# Altium PCB m2m00.PcbDoc
Units mil, origin at the board's own origin, x right, y up, seen from the top; angles counter-clockwise.
Board outline 2238.38 x 2309.5 mil, 2 copper layers (Top Layer, Bottom Layer); 171 components, 130 nets, 571 pads, 4 vias.
Unrouted connection lines stored in the file: 289.
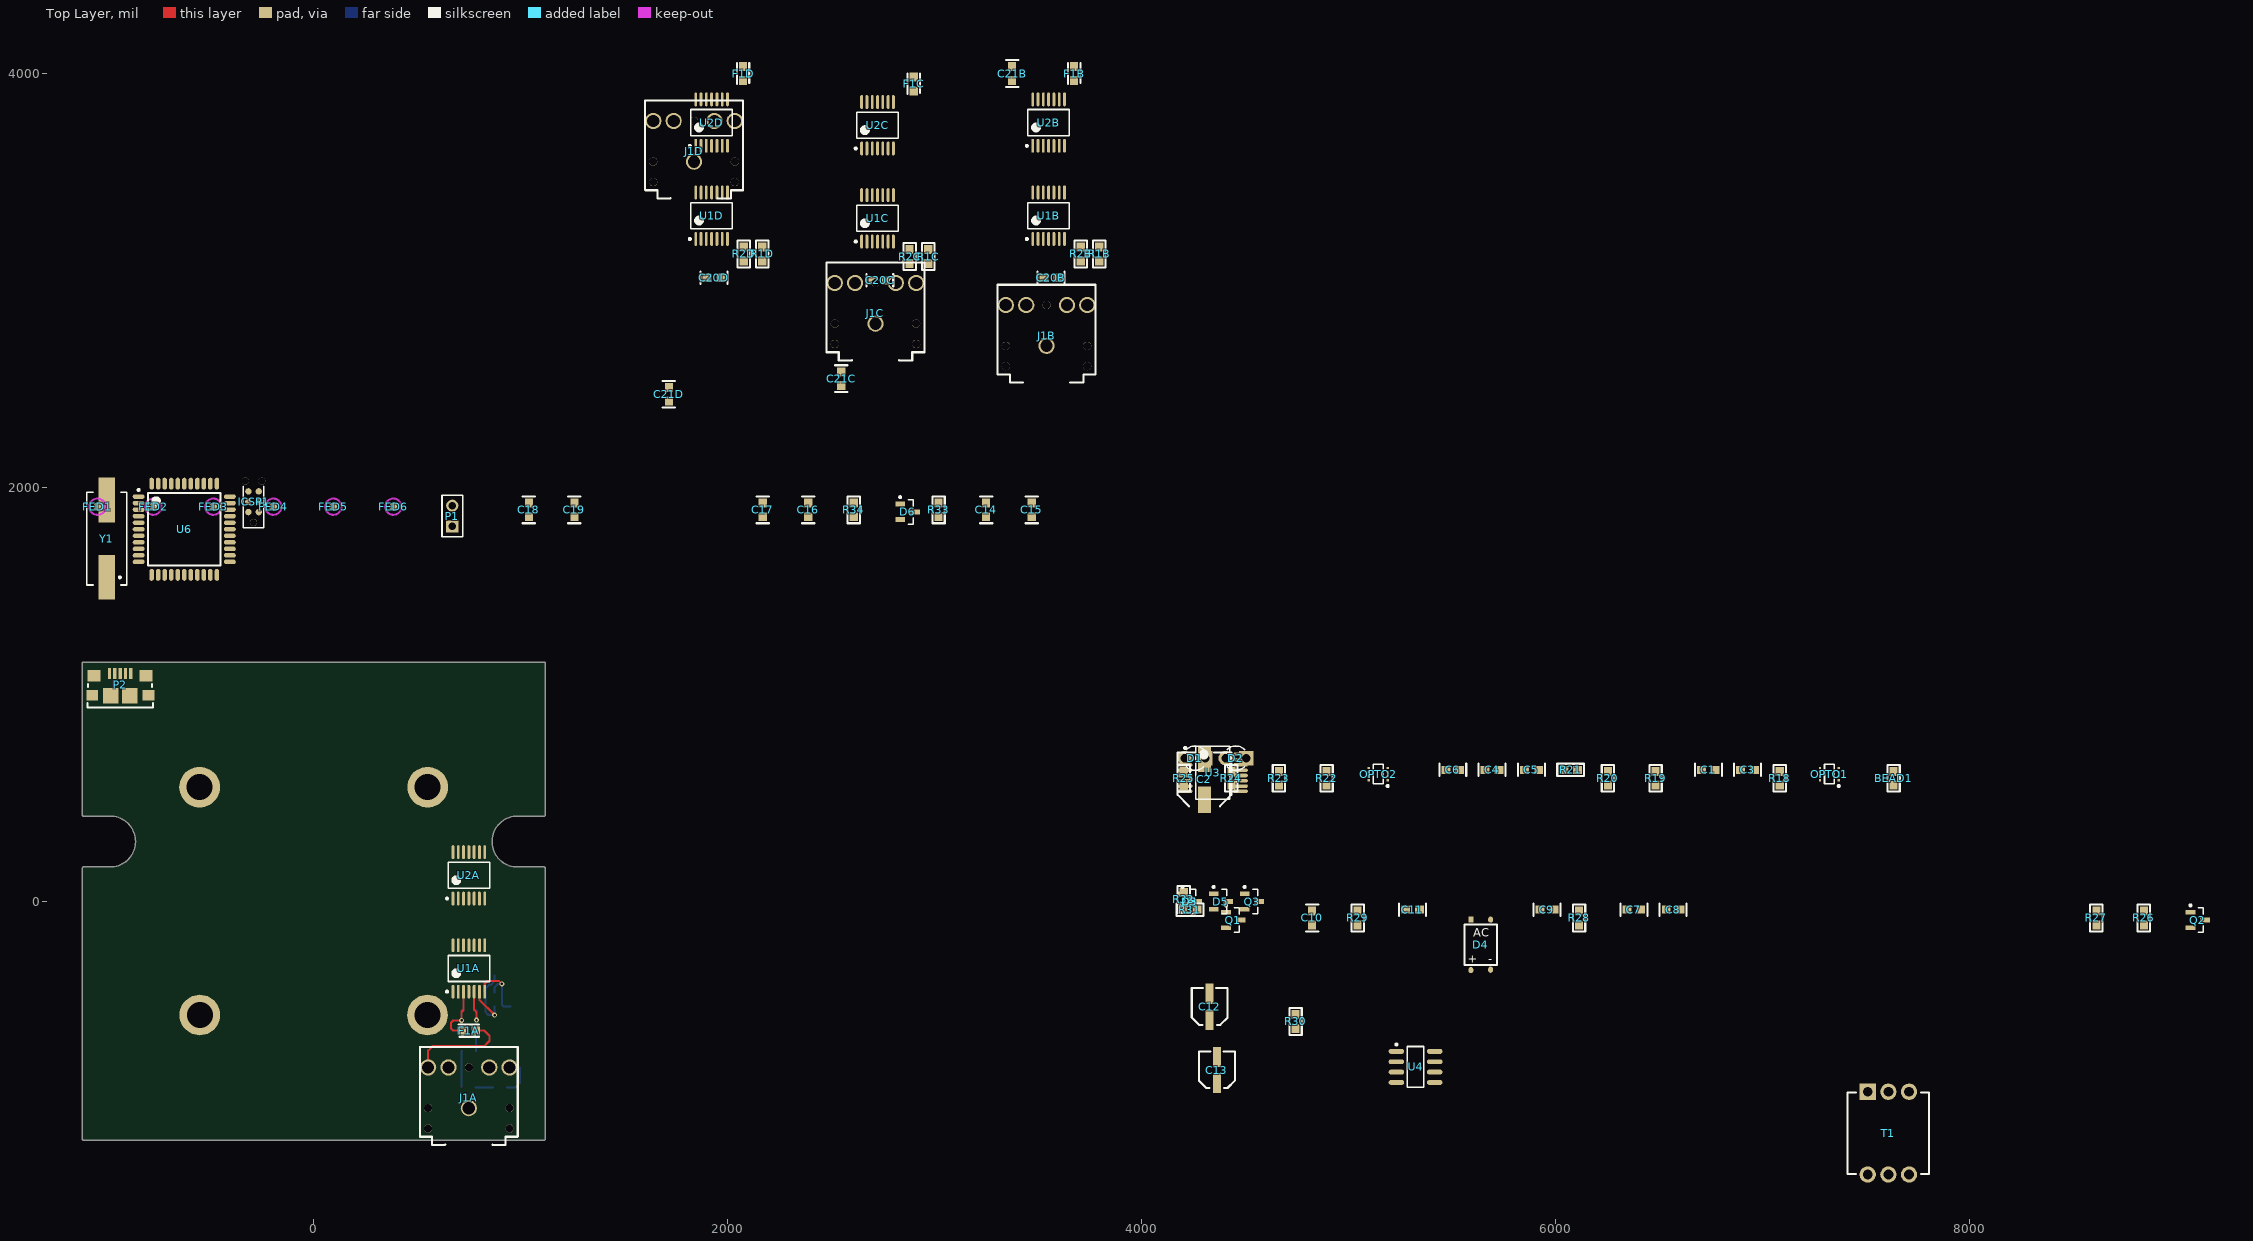
[diagram p0: Top Layer view]
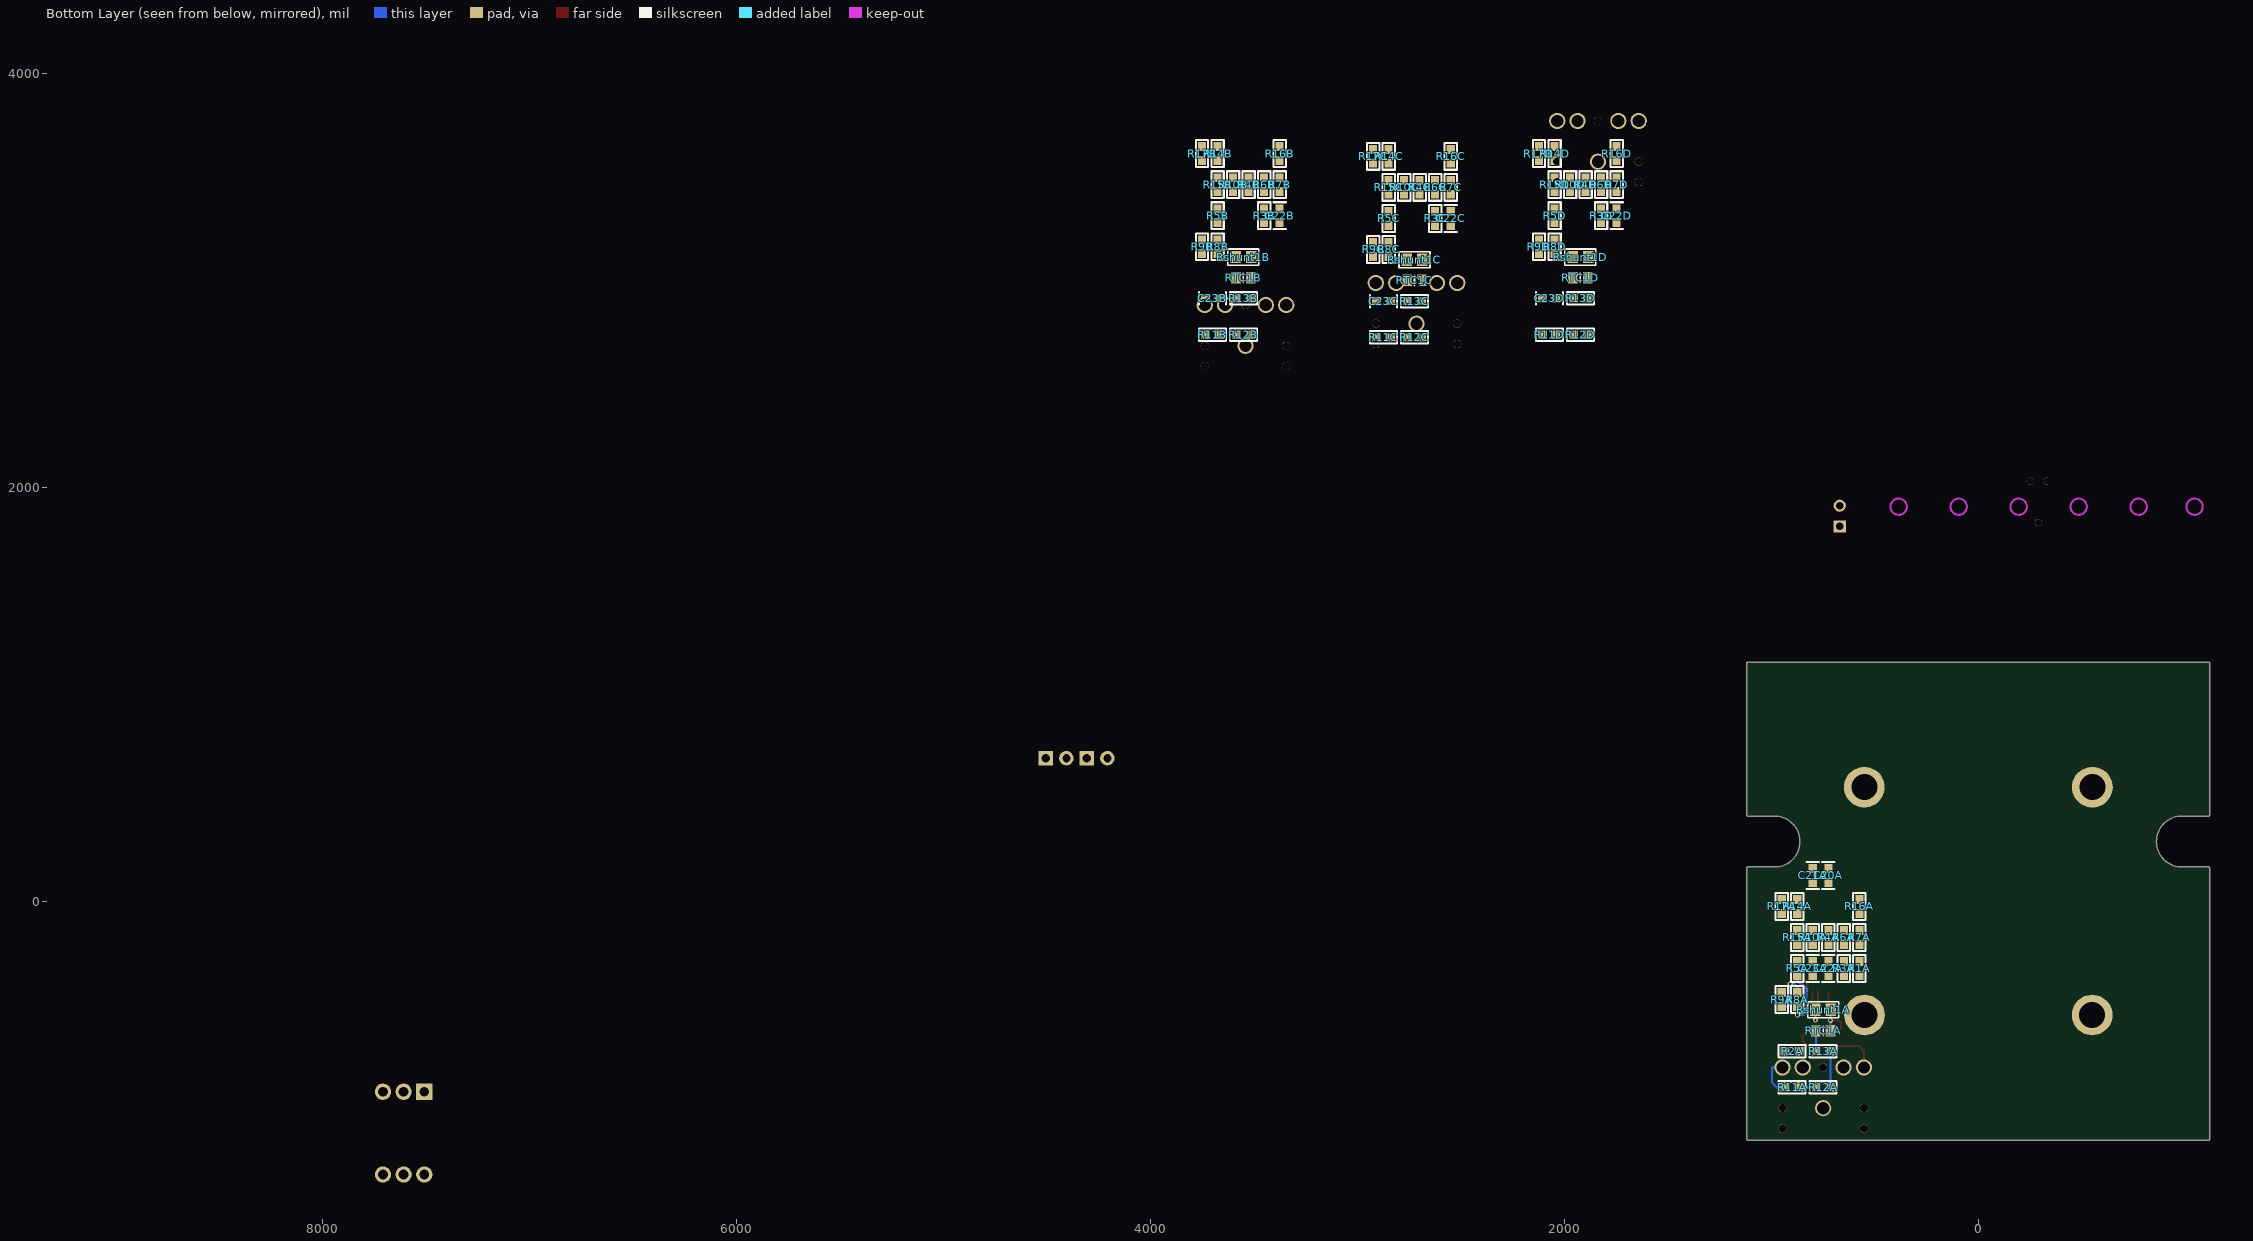
[diagram p1: Bottom Layer view, seen from below]

## Layer stack, top to bottom
Top Layer: signal copper 1.4
Dielectric: dielectric 12.6, FR-4, Dk 4.8
Bottom Layer: signal copper 1.4

## Board outline
-1112.6,-1154.62 cw(c-1112.6,-1149.6) -1117.61,-1149.6 -1117.61,160.43 cw(c-1112.6,160.43) -1112.6,165.45 -983.46,165.45 ccw(c-983.46,288.39) -860.53,288.39 ccw(c-983.46,288.39) -983.46,411.32 -1112.6,411.32 cw(c-1112.6,416.34) -1117.52,415.36 cw(c-1114.17,419.09) -1119.19,419.09 -1119.19,1149.87 cw(c-1114.17,1149.87) -1114.17,1154.89 1114.17,1154.89 cw(c1114.17,1149.87) 1119.19,1149.87 1119.19,419.09 cw(c1114.17,419.09) 1119,417.72 cw(c1114.17,416.34) 1119.19,416.34 cw(c1114.17,416.34) 1114.17,411.32 985.04,411.32 ccw(c985.04,288.39) 985.04,165.45 1114.17,165.45 cw(c1114.17,160.43) 1119.19,160.43 1119.19,-1149.6 cw(c1114.17,-1149.6) 1114.17,-1154.62

## Design rules (kind name [scope] priority, off if disabled: settings)
Clearance [All] p1: gap=10
PolygonConnect [All] p1: connectstyle=Relief reliefconductorwidth=10 reliefentries=4 polygonreliefangle="90 Angle"
RoomDefinition "U_USB-UART (FTDI FT230XS)" [InComponentClass('U_USB-UART (FTDI FT230XS)')] p1: confinementstyle=ConfineIn formatcopy=TRUE lockcomponents=FALSE outline 4159.97,519.24 7884.97,519.24 7884.97,774.24 4159.97,774.24
RoomDefinition "U_Microprocessor PIC18F46K80" [InComponentClass('U_Microprocessor PIC18F46K80')] p2: confinementstyle=ConfineIn formatcopy=TRUE lockcomponents=FALSE outline -1110,1751.54 3610,1751.54 3610,2071.54 -1110,2071.54
RoomDefinition "U_ISOLATED PSU" [InComponentClass('U_ISOLATED PSU')] p3: confinementstyle=ConfineIn formatcopy=TRUE lockcomponents=FALSE outline 4159.97,-2240.76 9174.97,-2240.76 9174.97,99.24 4159.97,99.24
RoomDefinition U_ANALOGCHANNEL4 [InComponentClass('U_ANALOGCHANNEL4')] p4: confinementstyle=ConfineIn formatcopy=TRUE lockcomponents=FALSE outline 1673.23,2488.19 2173.23,2488.19 2173.23,4087.8 1673.23,4087.8
RoomDefinition U_ANALOGCHANNEL3 [InComponentClass('U_ANALOGCHANNEL3')] p5: confinementstyle=ConfineIn formatcopy=TRUE lockcomponents=FALSE outline 2475,2475.4 2975,2475.4 2975,4075 2475,4075
RoomDefinition U_ANALOGCHANNEL2 [InComponentClass('U_ANALOGCHANNEL2')] p6: confinementstyle=ConfineIn formatcopy=TRUE lockcomponents=FALSE outline 3301.77,2488.19 3801.77,2488.19 3801.77,4087.8 3301.77,4087.8
RoomDefinition U_ANALOGCHANNEL1 [InComponentClass('U_ANALOGCHANNEL1')] p7: confinementstyle=ConfineIn formatcopy=FALSE lockcomponents=FALSE outline 500,-1149.6 1000,-1149.6 1000,450 500,450
RoomDefinition Multi2Meter [InComponentClass('Multi2Meter')] p8: confinementstyle=ConfineIn formatcopy=TRUE lockcomponents=FALSE outline -1112.6,-1149.6 1114.17,-1149.6 1114.17,1149.87 -1112.6,1149.87
RoutingVias [All] p1: holewidth=12 width=24 viastyle="Through Hole" minholewidth=12 minwidth=24 maxholewidth=28 maxwidth=50
SilkscreenOverComponentPads [All] p1: minsilkscreentomaskgap=10
SolderMaskExpansion [All] p1: expansion=4
Width [All] p1: maxlimit=100 minlimit=10 preferedwidth=10
27 further rules are at their usual default settings.

## Classes and differential pairs
channel class "ANALOG CHANNEL": U_ANALOGCHANNEL1 U_ANALOGCHANNEL2 U_ANALOGCHANNEL3 U_ANALOGCHANNEL4
net class V_OUT[1..4]: V_OUT1 V_OUT2 V_OUT3 V_OUT4
net class I_OUT[1..4]: I_OUT1 I_OUT2 I_OUT3 I_OUT4
net class FREQ[1..4]: FREQ1 FREQ2 FREQ3 FREQ4
component class "U_USB-UART (FTDI FT230XS)": BEAD1 C1 C2 C3 C4 C5 C6 D1 D2 OPTO1 OPTO2 R18 R19 R20 R21 R22 R23 R24 R25 U3
component class "U_Microprocessor PIC18F46K80": C14 C15 C16 C17 C18 C19 D6 FED1 FED2 FED3 FED4 FED5 FED6 ICSP1 P1 R33 R34 U6 Y1
component class "U_ISOLATED PSU": C7 C8 C9 C10 C11 C12 C13 D3 D4 D5 Q1 Q2 Q3 R26 R27 R28 R29 R30 R31 R32 T1 U4 U5
component class U_ANALOGCHANNEL4: C20D C21D C22D C23D F1D J1D R1D R2D R3D R4D R5D R6D R7D R8D R9D R10D R11D R12D R13D R14D R15D R16D R17D Rshunt1D RTC1D U1D U2D
component class U_ANALOGCHANNEL3: C20C C21C C22C C23C F1C J1C R1C R2C R3C R4C R5C R6C R7C R8C R9C R10C R11C R12C R13C R14C R15C R16C R17C Rshunt1C RTC1C U1C U2C
component class U_ANALOGCHANNEL2: C20B C21B C22B C23B F1B J1B R1B R2B R3B R4B R5B R6B R7B R8B R9B R10B R11B R12B R13B R14B R15B R16B R17B Rshunt1B RTC1B U1B U2B
component class U_ANALOGCHANNEL1: C20A C21A C22A C23A F1A J1A R1_U_ANALOGCHANNEL1 R1A R2A R3_U_ANALOGCHANNEL1 R3A R4A R5_U_ANALOGCHANNEL1 R5A R6A R7A R8_U_ANALOGCHANNEL1 R8A R9_U_ANALOGCHANNEL1 R9A R10_U_ANALOGCHANNEL1 R10A R11_U_ANALOGCHANNEL1 R11A R12_U_ANALOGCHANNEL1 R12A R13_U_ANALOGCHANNEL1 R13A R14_U_ANALOGCHANNEL1 R14A R15_U_ANALOGCHANNEL1 R15A R16_U_ANALOGCHANNEL1 R16A R17_U_ANALOGCHANNEL1 R17A Rshunt1A RTC1A U1A U2A
component class Multi2Meter: P2

## Components (designator, comment, footprint, x,y, rotation, side; value= is the part's Value field where it differs from the comment)
BEAD1 "MH1608-601Y" "RES (3D) - 0603" 7634.97,594.24 r90 top
C1 "10nF" "CAP (3D) - 0603" 6739.97,634.24 r0 top
C2 "47uF" "CAP ELECTRO SIZE-D" 4304.89,588.82 r0 top
C3 "10nF" "CAP (3D) - 0603" 6929.97,634.24 r0 top
C4 "47pF" "CAP (3D) - 0603" 5694.97,634.24 r0 top
C5 "47pF" "CAP (3D) - 0603" 5884.97,634.24 r0 top
C6 "100nF" "CAP (3D) - 0603" 5504.97,634.24 r0 top
C7 "100nF" "CAP (3D) - 0603" 6379.97,-40.76 r0 top
C8 "100nF" "CAP (3D) - 0603" 6569.97,-40.76 r0 top
C9 "100nF" "CAP (3D) - 0603" 5959.97,-40.76 r0 top
C10 "100nF" "CAP (3D) - 0603" 4824.97,-80.76 r90 top
C11 "100nF" "CAP (3D) - 0603" 5309.97,-40.76 r0 top
C12 "10uF" "CAP ELECTRO SIZE-B" 4329.97,-510.76 r0 top
C13 "10uF" "CAP ELECTRO SIZE-B" 4364.97,-815.76 r0 top
C14 "100nF" "CAP (3D) - 0603" 3250,1891.54 r90 top
C15 "100nF" "CAP (3D) - 0603" 3470,1891.54 r90 top
C16 "100nF" "CAP (3D) - 0603" 2390,1891.54 r90 top
C17 "100nF" "CAP (3D) - 0603" 2170,1891.54 r90 top
C18 "15pF" "CAP (3D) - 0603" 1040,1891.54 r90 top
C19 "15pF" "CAP (3D) - 0603" 1260,1891.54 r90 top
C20A "100nF" "CAP (3D) - 0603" 725,125 r270 bottom (schematic designator C20)
C20B "100nF" "CAP (3D) - 0603" 3562.65,3012.8 r0 top (schematic designator C20)
C20C "100nF" "CAP (3D) - 0603" 2735.88,3000 r0 top (schematic designator C20)
C20D "100nF" "CAP (3D) - 0603" 1934.11,3012.8 r0 top (schematic designator C20)
C21A "100nF" "CAP (3D) - 0603" 800,125 r90 bottom (schematic designator C21)
C21B "100nF" "CAP (3D) - 0603" 3375,4000 r270 top (schematic designator C21)
C21C "100nF" "CAP (3D) - 0603" 2550,2525 r270 top (schematic designator C21)
C21D "100nF" "CAP (3D) - 0603" 1716.69,2449.95 r270 top (schematic designator C21)
C22A "100nF" "CAP (3D) - 0603" 725,-325 r270 bottom (schematic designator C22)
C22B "100nF" "CAP (3D) - 0603" 3376.77,3312.8 r90 bottom (schematic designator C22)
C22C "100nF" "CAP (3D) - 0603" 2550,3300 r90 bottom (schematic designator C22)
C22D "100nF" "CAP (3D) - 0603" 1748.23,3312.8 r90 bottom (schematic designator C22)
C23A "100nF" "CAP (3D) - 0603" 800,-325 r90 bottom (schematic designator C23)
C23B "100nF" "CAP (3D) - 0603" 3701.77,2912.8 r180 bottom (schematic designator C23)
C23C "100nF" "CAP (3D) - 0603" 2875,2900 r180 bottom (schematic designator C23)
C23D "100nF" "CAP (3D) - 0603" 2073.23,2912.8 r180 bottom (schematic designator C23)
D1 "GREEN 3mm" "LED(3D) 3MM VERTICAL (GREEN)" 4258.91,691.47 r0 top
D2 "RED 3mm" "LED(3D) 3MM VERTICAL (GREEN)" 4456.91,691.47 r0 top
D3 "5V1" SOT23-3L 4234.93,-1.47 r0 top
D4 "MB110S-TP" TO-269AA 5639.97,-210.76 r0 top
D5 "5V1" SOT23-3L 4384.85,-1.47 r0 top
D6 "BAV99" SOT23-3L 2870,1881.54 r0 top
F1A "Fuse 1" "FUSE (3D) - 0603" 750,-625 r0 top (schematic designator F1)
F1B "Fuse 1" "FUSE (3D) - 0603" 3675,4000 r90 top (schematic designator F1)
F1C "Fuse 1" "FUSE (3D) - 0603" 2900,3950 r90 top (schematic designator F1)
F1D "Fuse 1" "FUSE (3D) - 0603" 2075,4000 r90 top (schematic designator F1)
FED1 "Feducial" Feducial -1045,1906.54 r90 top
FED2 "Feducial" Feducial -775,1906.54 r90 top
FED3 "Feducial" Feducial -485,1906.54 r90 top
FED4 "Feducial" Feducial -195,1906.54 r90 top
FED5 "Feducial" Feducial 95,1906.54 r90 top
FED6 "Feducial" Feducial 385,1906.54 r90 top
ICSP1 "TAG CONNECT" "ICSP - TAG CONNECT TYPE2" -290.34,1830.54 r90 top
J1A "PENDANT" "3.5MM pcb mouNt" 750,-1000 r270 top (schematic designator J1)
J1B "PENDANT" "3.5MM pcb mouNt" 3541.8,2683.95 r270 top (schematic designator J1)
J1C "PENDANT" "3.5MM pcb mouNt" 2715.03,2791.16 r270 top (schematic designator J1)
J1D "PENDANT" "3.5MM pcb mouNt" 1838.26,3573.95 r270 top (schematic designator J1)
OPTO1 "LTV-816S" S-DIP-B8 7324.97,614.24 r90 top
OPTO2 "LTV-816S" S-DIP-B8 5144.97,614.24 r90 top
P1 "TEST" HDR1X2 670,1811.54 r90 top
P2 "Header 4" "MICRO USB" -935.21,1099.3 r0 top
Q1 "MMUN2211LT1" SOT23-3L 4444.97,-90.76 r0 top
Q2 "BC817" SOT23-3L 9104.97,-90.76 r0 top
Q3 "BC807" SOT23-3L 4534.77,-1.47 r0 top
R1A "10k" "RES (3D) - 0603" 575,-325 r90 bottom (schematic designator R1)
R1B "10k" "RES (3D) - 0603" 3796.77,3128.19 r90 top (schematic designator R1)
R1C "10k" "RES (3D) - 0603" 2970,3115.4 r90 top (schematic designator R1)
R1D "10k" "RES (3D) - 0603" 2168.23,3128.19 r90 top (schematic designator R1)
R2A "24k" "RES (3D) - 0603" 900,-725 r180 bottom (schematic designator R2)
R2B "24k" "RES (3D) - 0603" 3706.77,3128.19 r90 top (schematic designator R2)
R2C "24k" "RES (3D) - 0603" 2880,3115.4 r90 top (schematic designator R2)
R2D "24k" "RES (3D) - 0603" 2078.23,3128.19 r90 top (schematic designator R2)
R3A "16k" "RES (3D) - 0603" 650,-325 r270 bottom (schematic designator R3)
R3B "16k" "RES (3D) - 0603" 3451.77,3312.8 r270 bottom (schematic designator R3)
R3C "16k" "RES (3D) - 0603" 2625,3300 r270 bottom (schematic designator R3)
R3D "16k" "RES (3D) - 0603" 1823.23,3312.8 r270 bottom (schematic designator R3)
R4A "100k" "RES (3D) - 0603" 725,-175 r270 bottom (schematic designator R4)
R4B "100k" "RES (3D) - 0603" 3526.77,3462.8 r270 bottom (schematic designator R4)
R4C "100k" "RES (3D) - 0603" 2700,3450 r270 bottom (schematic designator R4)
R4D "100k" "RES (3D) - 0603" 1898.23,3462.8 r270 bottom (schematic designator R4)
R5A "10k" "RES (3D) - 0603" 875,-325 r270 bottom (schematic designator R5)
R5B "10k" "RES (3D) - 0603" 3676.77,3312.8 r270 bottom (schematic designator R5)
R5C "10k" "RES (3D) - 0603" 2850,3300 r270 bottom (schematic designator R5)
R5D "10k" "RES (3D) - 0603" 2048.23,3312.8 r270 bottom (schematic designator R5)
R6A "100k" "RES (3D) - 0603" 650,-175 r270 bottom (schematic designator R6)
R6B "100k" "RES (3D) - 0603" 3451.77,3462.8 r270 bottom (schematic designator R6)
R6C "100k" "RES (3D) - 0603" 2625,3450 r270 bottom (schematic designator R6)
R6D "100k" "RES (3D) - 0603" 1823.23,3462.8 r270 bottom (schematic designator R6)
R7A "11k" "RES (3D) - 0603" 575,-175 r270 bottom (schematic designator R7)
R7B "11k" "RES (3D) - 0603" 3376.77,3462.8 r270 bottom (schematic designator R7)
R7C "11k" "RES (3D) - 0603" 2550,3450 r270 bottom (schematic designator R7)
R7D "11k" "RES (3D) - 0603" 1748.23,3462.8 r270 bottom (schematic designator R7)
R8A "16k" "RES (3D) - 0603" 875,-475 r270 bottom (schematic designator R8)
R8B "16k" "RES (3D) - 0603" 3676.77,3162.8 r270 bottom (schematic designator R8)
R8C "16k" "RES (3D) - 0603" 2850,3150 r270 bottom (schematic designator R8)
R8D "16k" "RES (3D) - 0603" 2048.23,3162.8 r270 bottom (schematic designator R8)
R9A "10k" "RES (3D) - 0603" 950,-475 r90 bottom (schematic designator R9)
R9B "10k" "RES (3D) - 0603" 3751.77,3162.8 r90 bottom (schematic designator R9)
R9C "10k" "RES (3D) - 0603" 2925,3150 r90 bottom (schematic designator R9)
R9D "10k" "RES (3D) - 0603" 2123.23,3162.8 r90 bottom (schematic designator R9)
R10A "24k" "RES (3D) - 0603" 800,-175 r270 bottom (schematic designator R10)
R10B "24k" "RES (3D) - 0603" 3601.77,3462.8 r270 bottom (schematic designator R10)
R10C "24k" "RES (3D) - 0603" 2775,3450 r270 bottom (schematic designator R10)
R10D "24k" "RES (3D) - 0603" 1973.23,3462.8 r270 bottom (schematic designator R10)
R11A "9M1" "RES (3D) - 0603" 900,-900 r0 bottom (schematic designator R11)
R11B "9M1" "RES (3D) - 0603" 3701.77,2737.8 r0 bottom (schematic designator R11)
R11C "9M1" "RES (3D) - 0603" 2875,2725 r0 bottom (schematic designator R11)
R11D "9M1" "RES (3D) - 0603" 2073.23,2737.8 r0 bottom (schematic designator R11)
R12A "470k" "RES (3D) - 0603" 750,-900 r0 bottom (schematic designator R12)
R12B "470k" "RES (3D) - 0603" 3551.77,2737.8 r0 bottom (schematic designator R12)
R12C "470k" "RES (3D) - 0603" 2725,2725 r0 bottom (schematic designator R12)
R12D "470k" "RES (3D) - 0603" 1923.23,2737.8 r0 bottom (schematic designator R12)
R13A "430k" "RES (3D) - 0603" 750,-725 r180 bottom (schematic designator R13)
R13B "430k" "RES (3D) - 0603" 3551.77,2912.8 r180 bottom (schematic designator R13)
R13C "430k" "RES (3D) - 0603" 2725,2900 r180 bottom (schematic designator R13)
R13D "430k" "RES (3D) - 0603" 1923.23,2912.8 r180 bottom (schematic designator R13)
R14A "100k" "RES (3D) - 0603" 875,-25 r90 bottom (schematic designator R14)
R14B "100k" "RES (3D) - 0603" 3676.77,3612.8 r90 bottom (schematic designator R14)
R14C "100k" "RES (3D) - 0603" 2850,3600 r90 bottom (schematic designator R14)
R14D "100k" "RES (3D) - 0603" 2048.23,3612.8 r90 bottom (schematic designator R14)
R15A "100k" "RES (3D) - 0603" 875,-175 r270 bottom (schematic designator R15)
R15B "100k" "RES (3D) - 0603" 3676.77,3462.8 r270 bottom (schematic designator R15)
R15C "100k" "RES (3D) - 0603" 2850,3450 r270 bottom (schematic designator R15)
R15D "100k" "RES (3D) - 0603" 2048.23,3462.8 r270 bottom (schematic designator R15)
R16A "24k" "RES (3D) - 0603" 575,-25 r90 bottom (schematic designator R16)
R16B "24k" "RES (3D) - 0603" 3376.77,3612.8 r90 bottom (schematic designator R16)
R16C "24k" "RES (3D) - 0603" 2550,3600 r90 bottom (schematic designator R16)
R16D "24k" "RES (3D) - 0603" 1748.23,3612.8 r90 bottom (schematic designator R16)
R17A "11k" "RES (3D) - 0603" 950,-25 r90 bottom (schematic designator R17)
R17B "11k" "RES (3D) - 0603" 3751.77,3612.8 r90 bottom (schematic designator R17)
R17C "11k" "RES (3D) - 0603" 2925,3600 r90 bottom (schematic designator R17)
R17D "11k" "RES (3D) - 0603" 2123.23,3612.8 r90 bottom (schematic designator R17)
R18 "470R" "RES (3D) - 0603" 7084.97,594.24 r90 top
R19 "27R" "RES (3D) - 0603" 6484.97,594.24 r90 top
R20 "1k" "RES (3D) - 0603" 6254.97,594.24 r90 top
R21 "27R" "RES (3D) - 0603" 6074.97,634.24 r0 top
R22 "470R" "RES (3D) - 0603" 4894.97,594.24 r90 top
R23 "1k" "RES (3D) - 0603" 4664.97,594.24 r90 top
R24 "470R" "RES (3D) - 0603" 4434.97,594.24 r90 top
R25 "470R" "RES (3D) - 0603" 4204.97,594.24 r90 top
R26 "1k" "RES (3D) - 0603" 8844.97,-80.76 r90 top
R27 "100k" "RES (3D) - 0603" 8614.97,-80.76 r90 top
R28 "100R" "RES (3D) - 0603" 6114.97,-80.76 r90 top
R29 "100k" "RES (3D) - 0603" 5044.97,-80.76 r90 top
R30 "1k" "RES (3D) - 0603" 4744.97,-580.76 r90 top
R31 "10k" "RES (3D) - 0603" 4234.97,-40.76 r0 top
R32 "10k" "RES (3D) - 0603" 4204.97,9.24 r90 top
R33 "1k" "RES (3D) - 0603" 3020,1891.54 r90 top
R34 "1k" "RES (3D) - 0603" 2610,1891.54 r90 top
Rshunt1A "0.1R" "RES (3D) - 0805" 750,-525 r0 bottom (schematic designator Rshunt1)
Rshunt1B "0.1R" "RES (3D) - 0805" 3551.77,3112.8 r0 bottom (schematic designator Rshunt1)
Rshunt1C "0.1R" "RES (3D) - 0805" 2725,3100 r0 bottom (schematic designator Rshunt1)
Rshunt1D "0.1R" "RES (3D) - 0805" 1923.23,3112.8 r0 bottom (schematic designator Rshunt1)
RTC1A "50V RMS" 6-0805_N 750,-625 r180 bottom (schematic designator RTC1)
RTC1B "50V RMS" 6-0805_N 3551.77,3012.8 r180 bottom (schematic designator RTC1)
RTC1C "50V RMS" 6-0805_N 2725,3000 r180 bottom (schematic designator RTC1)
RTC1D "50V RMS" 6-0805_N 1923.23,3012.8 r180 bottom (schematic designator RTC1)
T1 "MURATA 782485/55C" 78248 7609.97,-1120.76 r90 top
U1A "LM2902PW" PW014_N 750,-325 r90 top (schematic designator U1)
U1B "LM2902PW" PW014_N 3551.77,3312.8 r90 top (schematic designator U1)
U1C "LM2902PW" PW014_N 2725,3300 r90 top (schematic designator U1)
U1D "LM2902PW" PW014_N 1923.23,3312.8 r90 top (schematic designator U1)
U2A "LM2902PW" PW014_N 750,125 r90 top (schematic designator U2)
U2B "LM2902PW" PW014_N 3551.77,3762.8 r90 top (schematic designator U2)
U2C "LM2902PW" PW014_N 2725,3750 r90 top (schematic designator U2)
U2D "LM2902PW" PW014_N 1923.23,3762.8 r90 top (schematic designator U2)
U3 "FT230XS" SSOP16_L 4345.17,620.38 r0 top
U4 "MAX253" SO-8C_L 5324.97,-800.76 r0 top
U5 "LM4040AIM3-2.0" SOT23-3L 4234.93,-1.47 r0 top
U6 "PIC18F46K80-I/PT" TQFP44_L -625.28,1797.6 r0 top
Y1 "XTAL" HC49/4H_SMX -999.61,1752.26 r90 top

## Footprints (in the part's own frame and the unit in brackets; to place one, negate y for a bottom-side part, rotate by r counter-clockwise, add the part's x,y. Pads: shape width x height; smd on the part's side, far side on the other; paste and mask are expansions set on the pad)
"3.5MM pcb mouNt" [mm]
  round 1 hole 1: 0(-5,0) 0(0,5) 0(0,-5) 0(2.5,5) 0(2.5,-5)
  round 2 hole 1.5: 1(0,0) 2(-5,5) 3(-5,2.5) 4(-5,-2.5) 5(-5,-5)
  silkscreen extent -7.5,-6.01 4.5,6.01, body extent -7.5,-6 6.55,6, height 5.52
6-0805_N [mm] "Chip Resistor, Body 2.0x1.2mm, IPC Medium Density"
  rect 1.2x1.4 smd: 1(-0.9,0) 2(0.9,0)
  silkscreen extent 0,-0.6 0,0.6, body extent -1.07,-0.7 1.07,0.7, height 0.7
78248 [mm]
  rect 2x2 hole 1.2: 1(5.08,2.54)
  round 2 hole 1.2: 2(5.08,0) 3(5.08,-2.54) 4(-5.08,-2.54) 5(-5.08,0) 6(-5.08,2.54)
  silkscreen extent -5,-5 5,5, body extent -5,-5 5,5, height 6.35
"CAP (3D) - 0603" [mm]
  rect 1.1x1 smd: 1(0.85,0) 2(-0.85,0)
  silkscreen extent -1.65,-0.76 1.65,0.76, body extent -0.8,-0.4 0.8,0.4, height 0.92
"CAP ELECTRO SIZE-B" [mm]
  rect 1x2.5 smd: 1(0,-1.6) 2(0,1.6)
  silkscreen extent -2.2,-2.2 2.2,2.3, body extent -2.15,-2.3 2.15,2.3, height 5.41
"CAP ELECTRO SIZE-D" [mm]
  rect 1.6x3.2 smd: 1(0,-2.5) 2(0,2.5)
  silkscreen extent -3.3,-3.3 3.3,3.3, body extent -3.3,-3.5 3.3,3.5, height 5.41
Feducial [mm]
  round 1 smd mask+1: 0(0,0)
  Keep-Out Layer circle w0.254: c0,0 r1
"FUSE (3D) - 0603" [mm]
  rect 1.1x1 smd: 1(0.85,0) 2(-0.85,0)
  silkscreen extent -1.27,-0.76 1.27,0.76, body extent -0.8,-0.4 0.8,0.4, height 0.92
HC49/4H_SMX [mm] "Quartz Crystal, SM; Body 13.4 (inc. leads) x 4.9 mm (LxW max)"
  rect 5.5x2 smd: 1(-4.75,0) 2(4.75,0)
  silkscreen extent -5.7,-2.45 5.7,2.45
HDR1X2 [mm] "Connector; Header; 2 Position"
  rect 1.5x1.5 hole 0.9: 1(0,0)
  round 1.5 hole 0.9: 2(2.54,0)
  silkscreen extent -1.27,-1.27 3.81,1.27
"ICSP - TAG CONNECT TYPE2" [mil] "ICSP - TAG CONNECT - TYPE 2"
  round 31 smd paste-40: 1(50,-25) 2(50,25) 3(100,-25) 4(100,25) 5(150,-25) 6(150,25)
  round 34 hole 35 unplated: A(0,0) B(200,40) C(200,-40)
  silkscreen extent -25,-50 175,50
"LED(3D) 3MM VERTICAL (GREEN)" [mil]
  rect 70x70 hole 40: 1(50.06,-0.28)
  round 70 hole 40: 2(-49.94,-0.28)
  silkscreen extent -42,-59 42,59, body extent -59,-59 59,59, height 236
"MICRO USB" [mm] "TE CONNECTIVITY 1981568-1"
  rect 1.45x1.3 smd: 0(-3.425,-2.625) 0(3.475,-2.625)
  rect 1.6x1.4 smd: 0(-3.2,-0.225) 0(3.2,-0.225)
  rect 1.9x1.9 smd: 0(-1.175,-2.675) 0(1.175,-2.675)
  rect 0.4x1.35 smd: 1(1.3,0) 2(0.65,0) 3(0,0) 4(-0.65,0) 5(-1.3,0)
  silkscreen extent -4.03,-4.13 4.03,-1.27, body extent -3.97,-5.3 4.03,0.3, height 2.83
PW014_N [mm] "TSOP, 14-Leads, Body 5x4.4mm, Pitch 0.65mm, IPC Medium Density"
  oval 1.7x0.35 smd: 1(-2.85,1.95) 2(-2.85,1.3) 3(-2.85,0.65) 4(-2.85,0) 5(-2.85,-0.65) 6(-2.85,-1.3) 7(-2.85,-1.95) 8(2.85,-1.95) 9(2.85,-1.3) 10(2.85,-0.65) 11(2.85,0) 12(2.85,0.65) 13(2.85,1.3) 14(2.85,1.95)
  silkscreen extent -2.97,-2.55 1.6,2.8, body extent -2.25,-2.55 2.25,2.55, height 1.2
"RES (3D) - 0603" [mm]
  rect 1.1x1 smd: 1(0.85,0) 2(-0.85,0)
  silkscreen extent -1.65,-0.76 1.65,0.76, body extent -0.8,-0.4 0.8,0.4, height 0.92
"RES (3D) - 0805" [mm]
  rect 1.3x1.5 smd: 1(-0.95,0) 2(0.95,0)
  silkscreen extent -1.91,-0.99 1.91,0.99, body extent -1,-0.63 1,0.63, height 1
S-DIP-B8 [mm] "Shrink DIP; 8 Stub Leads; Row Spacing 2.28 mm; Pitch 0.5 mm"
  rect 0.3x0.3 smd: 1(-0.75,-1.15) 2(-0.25,-1.15) 3(0.25,-1.15) 4(0.75,-1.15) 5(0.75,1.15) 6(0.25,1.15) 7(-0.25,1.15) 8(-0.75,1.15)
  silkscreen extent -1.58,-1.28 1.2,0.6
SO-8C_L [mm] "SOIC, 8-Leads, Body 4.9x3.9mm, Pitch 1.27mm, IPC High Density"
  oval 1.9x0.6 smd: 1(-2.35,1.905) 2(-2.35,0.635) 3(-2.35,-0.635) 4(-2.35,-1.905) 5(2.35,-1.905) 6(2.35,-0.635) 7(2.35,0.635) 8(2.35,1.905)
  silkscreen extent -2.47,-2.5 1,2.88, body extent -2,-2.5 2,2.5, height 1.75
SOT23-3L [mm] "SOT23, 3-Leads, Body 2.9x1.3mm, Pitch 0.95mm, Lead Span 2.5mm, IPC High Density"
  rect 1.2x0.6 smd: 1(-0.9,0.95) 2(-0.9,-0.95) 3(0.9,0)
  silkscreen extent -1.02,-1.5 0.7,1.92, body extent -1.25,-1.5 1.25,1.5, height 1.12
SSOP16_L [mm] "SOP, 16-Leads, Body 6.2x5.3mm, Pitch 0.65mm, IPC High Density"
  oval 1.8x0.45 smd: 1(-3.4,2.275) 2(-3.4,1.625) 3(-3.4,0.975) 4(-3.4,0.325) 5(-3.4,-0.325) 6(-3.4,-0.975) 7(-3.4,-1.625) 8(-3.4,-2.275) 9(3.4,-2.275) 10(3.4,-1.625) 11(3.4,-0.975) 12(3.4,-0.325) 13(3.4,0.325) 14(3.4,0.975) 15(3.4,1.625) 16(3.4,2.275)
  silkscreen extent -3.52,-3.25 2.1,3.25, body extent -2.7,-3.25 2.7,3.25, height 2
TO-269AA [mm]
  rect 0.58x0.76 smd: 1(-1.2,3.1)
  oval 0.58x0.76 smd: 2(-1.2,-3.1) 3(1.21,-3.05) 4(1.21,3.1)
  silkscreen extent -2,-2.5 2,2.5, body extent -2,-2.5 2,2.5, height 3
TQFP44_L [mm] "44-Pin Plastic Thin Quad Flat Pack (TFQP44), IPC High Density"
  oval 1.45x0.55 smd: 1(-5.6,4) 2(-5.6,3.2) 3(-5.6,2.4) 4(-5.6,1.6) 5(-5.6,0.8) 6(-5.6,0) 7(-5.6,-0.8) 8(-5.6,-1.6) 9(-5.6,-2.4) 10(-5.6,-3.2) 11(-5.6,-4) 23(5.6,-4) 24(5.6,-3.2) 25(5.6,-2.4) 26(5.6,-1.6) 27(5.6,-0.8) 28(5.6,0) 29(5.6,0.8) 30(5.6,1.6) 31(5.6,2.4) 32(5.6,3.2) 33(5.6,4)
  oval 0.55x1.45 smd: 12(-4,-5.6) 13(-3.2,-5.6) 14(-2.4,-5.6) 15(-1.6,-5.6) 16(-0.8,-5.6) 17(0,-5.6) 18(0.8,-5.6) 19(1.6,-5.6) 20(2.4,-5.6) 21(3.2,-5.6) 22(4,-5.6) 34(4,5.6) 35(3.2,5.6) 36(2.4,5.6) 37(1.6,5.6) 38(0.8,5.6) 39(0,5.6) 40(-0.8,5.6) 41(-1.6,5.6) 42(-2.4,5.6) 43(-3.2,5.6) 44(-4,5.6)
  silkscreen extent -5.72,-4.45 4.45,4.95, body extent -5,-5 5,5, height 1.2

## Part data
BEAD1: library part "FERRITE BEAD 0603", "FERRITE BEAD 0603 BOURNS MH1608-601Y"
C1 C2 C3 C4 C5 C6 C7 C8 C9 C10 C11 C20A C20B C20C C20D C21A C21B C21C C21D C22A C22B C22C C22D C23A C23B C23C C23D: library part Cap, "Capacitor"
C12 C13: library part "Cap Pol1", "Polarized Capacitor (Radial)"
C14 C15 C16 C17 C18 C19: library part CAP, "CAPACITOR SMD 0402"
D1 D2: library part "LED 3mm RED", "3mm RED LED"
D3 D5: library part "D Zener", "Zener Diode"
D4: library part Bridge1, "Full Wave Schottky Diode Bridge"
D6: "DUAL DIODE, BAV99"
F1A F1B F1C F1D: "Fuse - F0603FA1000V032T"
ICSP1: library part "ICSP - TAG CONNECT"
J1A J1B J1C J1D: library part "Phonejack Stereo SW", "3-Conductor Jack with 2 break contacts (normals) and 2 auxiliary make contacts"
OPTO1 OPTO2: "Transistor Output Optocoupler"
P1: library part "Header 2", "Header, 2-Pin"
P2: "Header, 4-Pin"
Q1: library part "NPN DIGITAL TRANSISTOR"
Q2: "NPN Bipolar Transistor"
Q3: library part 2N3906, "PNP General Purpose Amplifier"
R1A R1B R1C R1D R2A R2B R2C R2D R3A R3B R3C R3D R4A R4B R4C R4D R5A R5B R5C R5D R6A R6B R6C R6D R7A R7B R7C R7D R8A R8B R8C R8D R9A R9B R9C R9D R10A R10B R10C R10D R11A R11B R11C R11D R12A R12B R12C R12D R13A R13B R13C R13D R14A R14B R14C R14D R15A R15B R15C R15D R16A R16B R16C R16D R17A R17B R17C R17D R32 R33 Rshunt1A Rshunt1B Rshunt1C Rshunt1D: library part "RES SMD 0603 10k", "RESISTOR SMD 0603 10k"
R18 R20 R22 R23 R24 R25: library part "RES SMD 0603 1k", "RESISTOR SMD 0603 1k"
R19 R21 R26 R27 R28 R29 R30 R31 R34: library part "RES SMD 0603 100R", "RESISTOR SMD 0603"
RTC1A RTC1B RTC1C RTC1D: library part "Res Varistor", "Varistor (Voltage-Sensitive Resistor)"
T1: library part "Trans CT", "Center-Tapped Transformer (Coupled Inductor Model)"
U1A U1B U1C U1D U2A U2B U2C U2D: "Quadruple Operational Amplifier"
U3: library part "FTDI FT230XS", "FTDI FT230XS USB - UART"
U5: "Precision Micropower Shunt Voltage Reference"
U6: library part PIC18F4XK80-I/PT, "PIC18F4XK80-I/PT"
Y1: "Crystal Oscillator"

## Free pads (board coordinates)
  round 196.85 hole 125.98: 0(-551.18,551.18) 0(-550,-550) 0(550,-550) 0(551.18,551.18)

## Via types
v1: diameter 24, hole 12, Top Layer to Bottom Layer, 4 vias

## Nets (pads, with @x,y where several pads share a name; then routed paths per layer and width w, separated by ;. In a path a pad name is that pad's centre, name@x,y a point inside that pad or via, vN(x,y) a via of type N, cw(c..) or ccw(c..) an arc to the next point about the centre after c; other vN are vias at no path point)
1V1: R17A.1 U6.8
1V2: R17B.1 U6.9
1V3: R17C.1 U6.10
1V4: R17D.1 U6.11
5V: C8.2 C21A.2 C21B.2 C21C.2 C21D.2 C23A.2 C23B.2 C23C.2 C23D.2 Q2.2 R32.2 U1A.4 U1B.4 U1C.4 U1D.4 U2A.4 U2B.4 U2C.4 U2D.4
10V1: R16A.1 U6.32
10V2: R16B.1 U6.35
10V3: R16C.1 U6.36
10V4: R16D.1 U6.43
100MA1: R7A.1 U6.2
100MA2: R7B.1 U6.3
100MA3: R7C.1 U6.4
100MA4: R7D.1 U6.5
-5V: C11.1 C20A.2 C20B.2 C20C.2 C20D.2 C22A.2 C22B.2 C22C.2 C22D.2 Q3.1 U1A.11 U1B.11 U1C.11 U1D.11 U2A.11 U2B.11 U2C.11 U2D.11
AMPS_INA: F1A.1 J1A.5 | length 499.4
  Top Layer w10: J1A.5 553.15,-721.85 575,-700 825,-700 850,-675 850,-650 825,-625 F1A.1
AMPS_INB: F1B.1 J1B.5
AMPS_INC: F1C.1 J1C.5
AMPS_IND: F1D.1 J1D.5
CBUS_0: R28.1 U3.12
COM: U5.2
FREQ1: U2A.8 U6.38
FREQ2: U2B.8 U6.39
FREQ3: U2C.8 U6.40
FREQ4: U2D.8 U6.41
FTDI_RX: R18.1 U3.2
FTDI_TX: OPTO2.3 R23.2 U3.15
GND: C7.1 C8.1 C10.2 C11.2 C12.2 C13.1 C14.2 C15.2 C16.2 C17.2 C18.2 C19.2 C20A.1 C20B.1 C20C.1 C20D.1 C21A.1 C21B.1 C21C.1 C21D.1 C22A.1 C22B.1 C22C.1 C22D.1 C23A.1 C23B.1 C23C.1 C23D.1 D3.1 D5.3 ICSP1.3 J1A.1 J1B.1 J1C.1 J1D.1 P1.1 P1.2 R6A.1 R6B.1 R6C.1 R6D.1 R10A.1 R10B.1 R10C.1 R10D.1 R13A.2 R13B.2 R13C.2 R13D.2 R15A.1 R15B.1 R15C.1 R15D.1 R20.1 R27.2 R29.1 RTC1A.1 RTC1B.1 RTC1C.1 RTC1D.1 T1.5 U2A.9 U2B.9 U2C.9 U2D.9 U6.6 U6.29 | length 98
  Bottom Layer w10: R13A.2@785.43,-723.03 RTC1A.1
GND_USB: C1.1 C2.1 C3.1 C4.1 C5.1 C6.1 C9.1 OPTO1.2 P2.4 Q1.2 R23.1 R24.2 R25.2 U3.3 U3.13 U4.2 U4.7
I_OUT1: U2A.1 U6.20
I_OUT2: U2B.1 U6.22
I_OUT3: U2C.1 U6.25
I_OUT4: U2D.1 U6.27
ICSP_PGCLCK: ICSP1.5 U6.16
ICSP_PGDATA: ICSP1.4 U6.17
ICSP_VPP: ICSP1.1 R34.2 U6.18
NetBEAD1_2: BEAD1.2 C2.2 C3.2 U3.10
NetC16_1: C16.1 D6.3 R33.2 R34.1
NetC17_1: C17.1 U6.23
NetD1_2: D1.2 R24.1
NetD2_2: D2.2 R25.1
NetD3_2: D3.3 Q2.1 R26.1
NetD4_2: D4.2 T1.4
NetD4_4: D4.4 T1.6
NetD5_1: D5.1 Q3.2 R30.1
NetF1A_2: F1A.2 Rshunt1A.1 RTC1A.2 U1A.3 | length 380
  Top Layer w10: F1A.2 675,-625 663.43,-613.43 663.43,-588.54 675.98,-575.98 v1(714.57,-575.98) 714.57,-535.43 724.41,-525.59 U1A.3
  Bottom Layer w10: RTC1A.2 v1(714.57,-575.98) Rshunt1A.1@714.57,-526.97
NetF1B_2: F1B.2 Rshunt1B.1 RTC1B.2 U1B.3
NetF1C_2: F1C.2 Rshunt1C.1 RTC1C.2 U1C.3
NetF1D_2: F1D.2 Rshunt1D.1 RTC1D.2 U1D.3
NetOPTO1_1: OPTO1.1 R18.2
NetOPTO2_1: OPTO2.1 R22.1
NetR1A_1: R1A.1 R2A.2 U1A.9
NetR1A_2: R1A.2 R3A.1 U1A.1
NetR1B_1: R1B.1 R2B.2 U1B.9
NetR1B_2: R1B.2 R3B.1 U1B.1
NetR1C_1: R1C.1 R2C.2 U1C.9
NetR1C_2: R1C.2 R3C.1 U1C.1
NetR1D_1: R1D.1 R2D.2 U1D.9
NetR1D_2: R1D.2 R3D.1 U1D.1
NetR2A_1: R2A.1 U1A.8 U1A.12
NetR2B_1: R2B.1 U1B.8 U1B.12
NetR2C_1: R2C.1 U1C.8 U1C.12
NetR2D_1: R2D.1 U1D.8 U1D.12
NetR3A_2: R3A.2 R5A.2 U1A.2
NetR3B_2: R3B.2 R5B.2 U1B.2
NetR3C_2: R3C.2 R5C.2 U1C.2
NetR3D_2: R3D.2 R5D.2 U1D.2
NetR4A_1: R4A.1 U1A.14 U2A.2
NetR4A_2: R4A.2 R6A.2 R7A.2 U1A.13
NetR4B_1: R4B.1 U1B.14 U2B.2
NetR4B_2: R4B.2 R6B.2 R7B.2 U1B.13
NetR4C_1: R4C.1 U1C.14 U2C.2
NetR4C_2: R4C.2 R6C.2 R7C.2 U1C.13
NetR4D_1: R4D.1 U1D.14 U2D.2
NetR4D_2: R4D.2 R6D.2 R7D.2 U1D.13
NetR5A_1: R5A.1 R8A.1 U1A.6 | length 461.6
  Top Layer w10: U1A.6 801.18,-476.18 v1(875,-550)
  Bottom Layer w10: 847.97,-403.75 830,-421.72 ; R8A.1 v1(875,-550) 845,-550 830,-535 830,-421.72 ; R5A.1 875,-385 855.12,-404.88 849.1,-404.88 832.27,-421.72 830,-421.72
NetR5B_1: R5B.1 R8B.1 U1B.6
NetR5C_1: R5C.1 R8C.1 U1C.6
NetR5D_1: R5D.1 R8D.1 U1D.6
NetR8A_2: R8A.2 R9A.2 U1A.7 | length 345.2
  Top Layer w10: U1A.7 826.77,-398.23 840,-385 895,-385 v1(910,-400)
  Bottom Layer w10: R8A.2 875,-415 890,-400 v1(910,-400) 910,-500 918.46,-508.46 R9A.2
NetR8B_2: R8B.2 R9B.2 U1B.7
NetR8C_2: R8C.2 R9C.2 U1C.7
NetR8D_2: R8D.2 R9D.2 U1D.7
NetR9A_1: R9A.1 R10A.2 U1A.10
NetR9B_1: R9B.1 R10B.2 U1B.10
NetR9C_1: R9C.1 R10C.2 U1C.10
NetR9D_1: R9D.1 R10D.2 U1D.10
NetR11A_2: R11A.2 R12A.1 | length 83.1
  Bottom Layer w10: R12A.1 R11A.2
NetR11B_2: R11B.2 R12B.1
NetR11C_2: R11C.2 R12C.1
NetR11D_2: R11D.2 R12D.1
NetR12A_2: R12A.2 R13A.1 U2A.5 | length 174.3
  Bottom Layer w10: R12A.2@715.31,-898.78 715.31,-726.22 R13A.1
NetR12B_2: R12B.2 R13B.1 U2B.5
NetR12C_2: R12C.2 R13C.1 U2C.5
NetR12D_2: R12D.2 R13D.1 U2D.5
NetR14A_1: R14A.1 U2A.7 U2A.10 U2A.13
NetR14A_2: R14A.2 R15A.2 R16A.2 R17A.2 U2A.6
NetR14B_1: R14B.1 U2B.7 U2B.10 U2B.13
NetR14B_2: R14B.2 R15B.2 R16B.2 R17B.2 U2B.6
NetR14C_1: R14C.1 U2C.7 U2C.10 U2C.13
NetR14C_2: R14C.2 R15C.2 R16C.2 R17C.2 U2C.6
NetR14D_1: R14D.1 U2D.7 U2D.10 U2D.13
NetR14D_2: R14D.2 R15D.2 R16D.2 R17D.2 U2D.6
NetR19_2: R19.2 U3.6
NetR21_2: R21.2 U3.7
NetR28_2: R28.2 U4.3
NetT1_1: T1.1 U4.1
NetT1_3: T1.3 U4.8
OSC1: C19.1 U6.31 Y1.2
OSC2: C18.1 U6.30 Y1.1
PWR_ENB: Q1.1 U3.14
S\H\U\T\D\O\W\N\: Q1.3 R31.2 U4.4
TTL_RX: OPTO1.3 R20.2 U6.1
TTL_TX: R22.2 U6.44
USB_D+: C4.2 P2.3 R19.1
USB_D-: C5.2 P2.2 R21.1
USB_RX_LED: D2.1 U3.5
USB_TX_LED: D1.1 U3.11
V1.024: R32.1 U2A.3 U2A.12 U2B.3 U2B.12 U2C.3 U2C.12 U2D.3 U2D.12 U5.1
V+: C7.2 C12.1 D4.1 Q2.3 R26.2 R27.1
V-: C10.1 C13.2 D4.3 Q3.3 R29.2 R30.2
V_OUT1: U2A.14 U6.19
V_OUT2: U2B.14 U6.21
V_OUT3: U2C.14 U6.24
V_OUT4: U2D.14 U6.26
VCC: C14.1 C15.1 D6.2 ICSP1.2 OPTO1.4 R33.1 U6.7 U6.28
VCC_USB: BEAD1.1 C1.2 C6.2 C9.2 OPTO2.4 P2.1 R31.1 T1.2 U3.1 U3.8 U3.9 U4.6
VOLTS_INA: J1A.2 R11A.1 Rshunt1A.2 U1A.5 | length 390.1
  Top Layer w10: U1A.5 775.59,-524.41 787,-535.82 v1(787,-575)
  Bottom Layer w10: v1(787,-575) 787.4,-574.6 Rshunt1A.2 ; R11A.1 975,-900 996.85,-878.15 996.85,-803.15 J1A.2
VOLTS_INB: J1B.2 R11B.1 Rshunt1B.2 U1B.5
VOLTS_INC: J1C.2 R11C.1 Rshunt1C.2 U1C.5
VOLTS_IND: J1D.2 R11D.1 Rshunt1D.2 U1D.5
pads on no net: D3.2 D5.2 D6.1 FED1.0 FED2.0 FED3.0 FED4.0 FED5.0 FED6.0 ICSP1.6 ICSP1.A ICSP1.B ICSP1.C J1A.0 J1A.3 J1A.4 J1B.0 J1B.3 J1B.4 J1C.0 J1C.3 J1C.4 J1D.0 J1D.3 J1D.4 OPTO1.5 OPTO1.6 OPTO1.7 OPTO1.8 OPTO2.2 OPTO2.5 OPTO2.6 OPTO2.7 OPTO2.8 P2.0 P2.5 U3.4 U3.16 U4.5 U5.3 U6.12 U6.13 U6.14 U6.15 U6.33 U6.34 U6.37 U6.42

## Silkscreen, mask and mechanical layers (free items; w line width, h text height)
Mechanical 1:
  circle w10: c-551.18,551.18 r62.99
  circle w10: c551.18,551.18 r62.99
  lines w10: -1114.17,419.09 -1114.17,1134.84 ; -1114.17,1132.35 -1114.17,1149.87 1114.17,1149.87 1114.17,1112.47 ; -1112.6,416.34 -983.46,416.34 cw(c-983.46,288.39) -983.46,160.43 -1112.6,160.43 -1112.6,-1149.6 1114.17,-1149.6 1114.17,160.43 985.04,160.43 cw(c985.04,288.39) 985.04,416.34 1114.17,416.34 ; 1114.17,419.09 1114.17,1134.84
Mechanical 2:
  lines w10: -1114.17,0 1114.17,0 ; -1112.6,160.43 -983.46,160.43 ccw(c-983.46,288.39) -983.46,416.34 -1112.6,416.34 ; -983.46,288.39 985.04,288.39 ; -551.18,0 551.18,0 ; -423.23,288.39 1114.96,288.39 ; 0,-1134.84 0,1134.84 ; 1114.17,160.43 985.04,160.43 cw(c985.04,288.39) 985.04,416.34 1114.17,416.34 ; -551.18,-551.18 551.18,-551.18 551.18,551.18 -551.18,551.18 -551.18,-551.18

## Text inside footprints (layer, text, board x,y; h text height)
D4: Top Overlay "AC" at 5604.54,-171.39 h40; Top Overlay "+" at 5576.98,-297.37 h40; Top Overlay "-" at 5675.4,-297.37 h40